# Altium PCB OPENMV_MT9V034.PcbDoc
Units mil, origin at the board's own origin, x right, y up, seen from the top; angles counter-clockwise.
Board outline 1377.95 x 695 mil, 2 copper layers (Top Layer, Bottom Layer); 15 components, 25 nets, 100 pads, 131 vias.
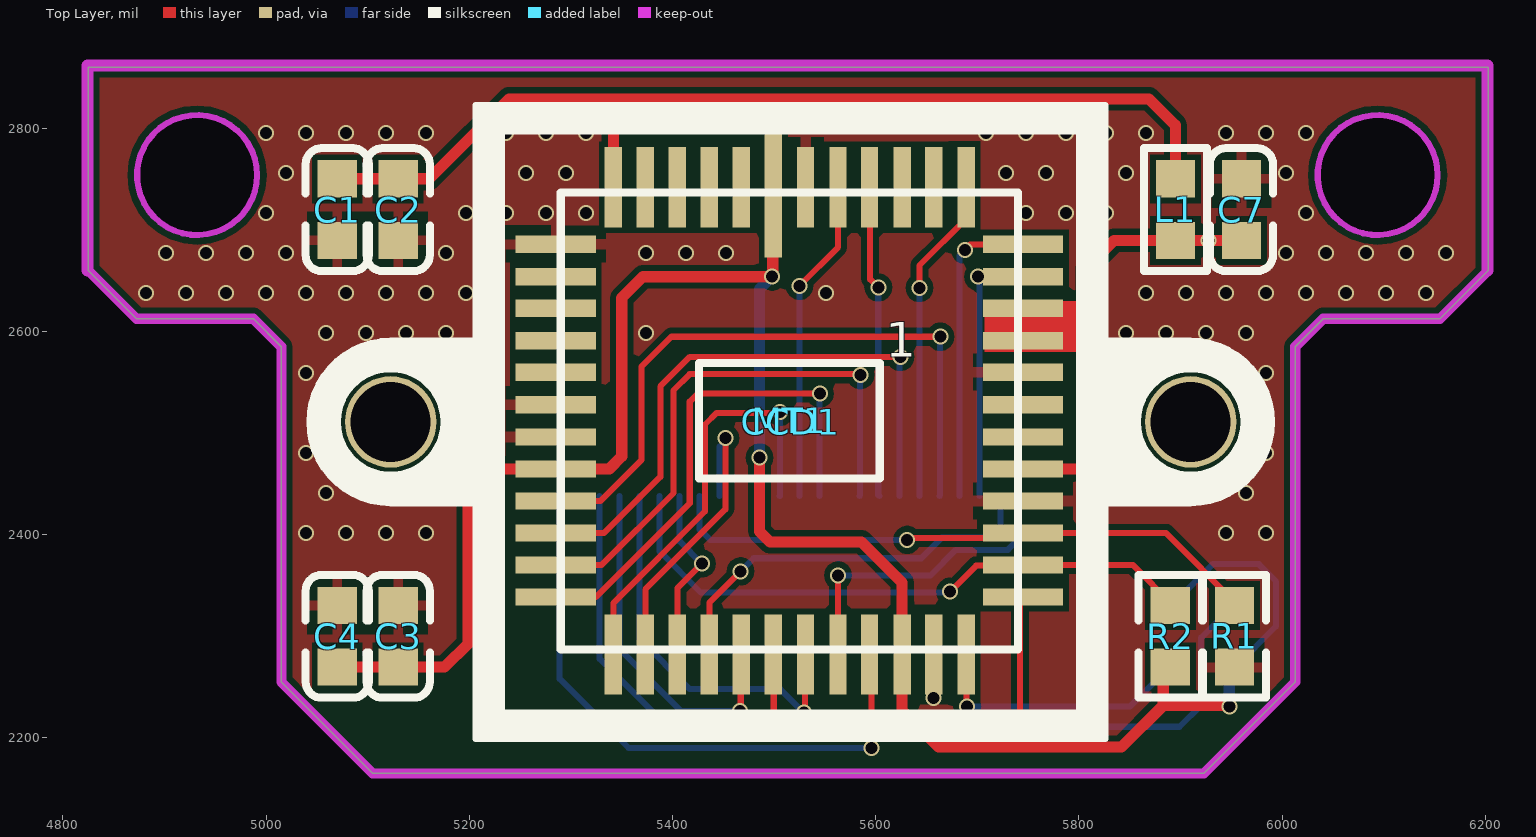
[diagram p0: Top Layer view]
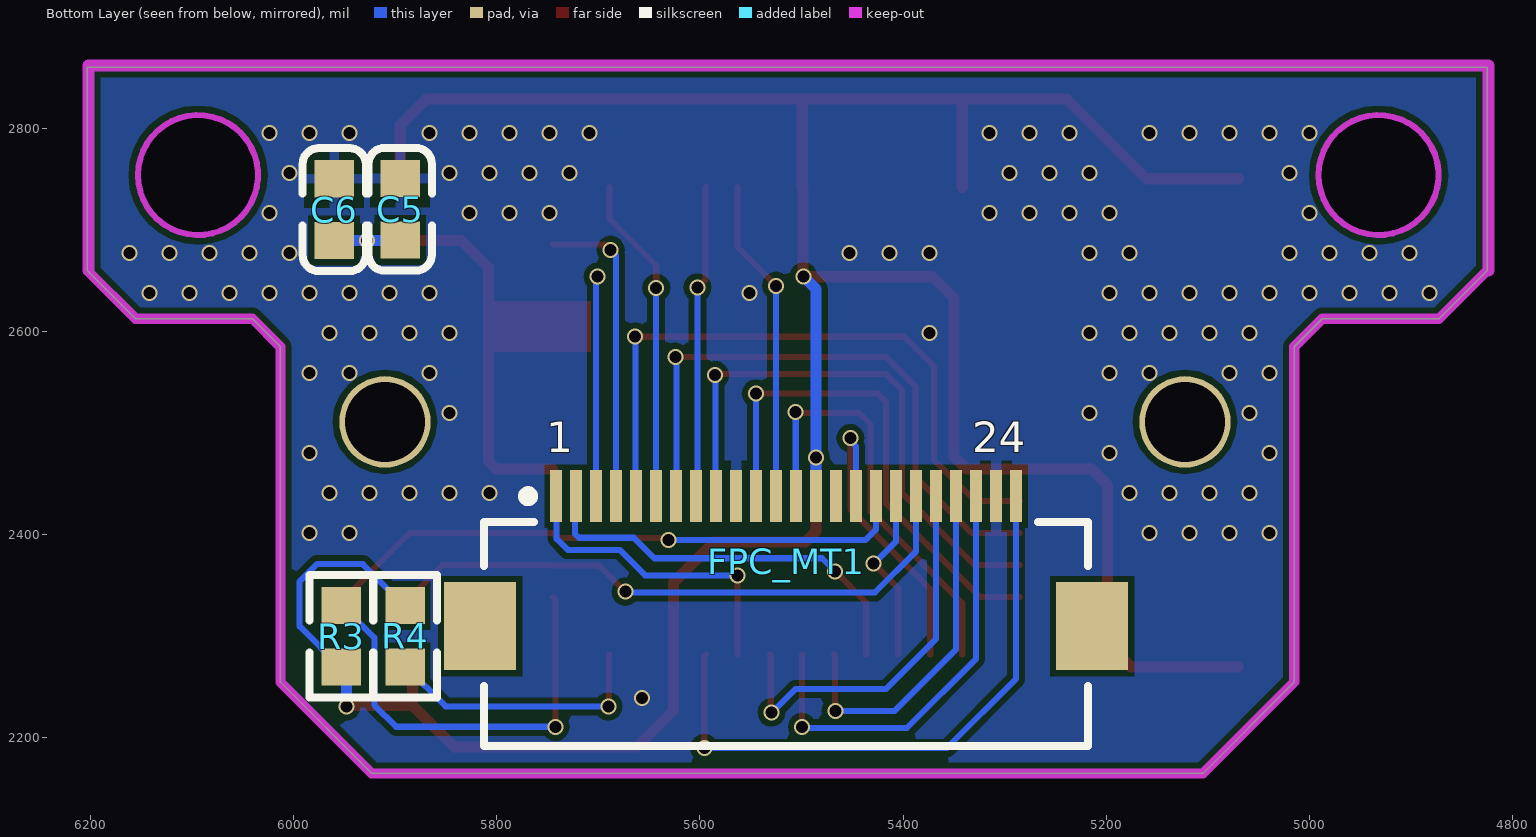
[diagram p1: Bottom Layer view, seen from below]
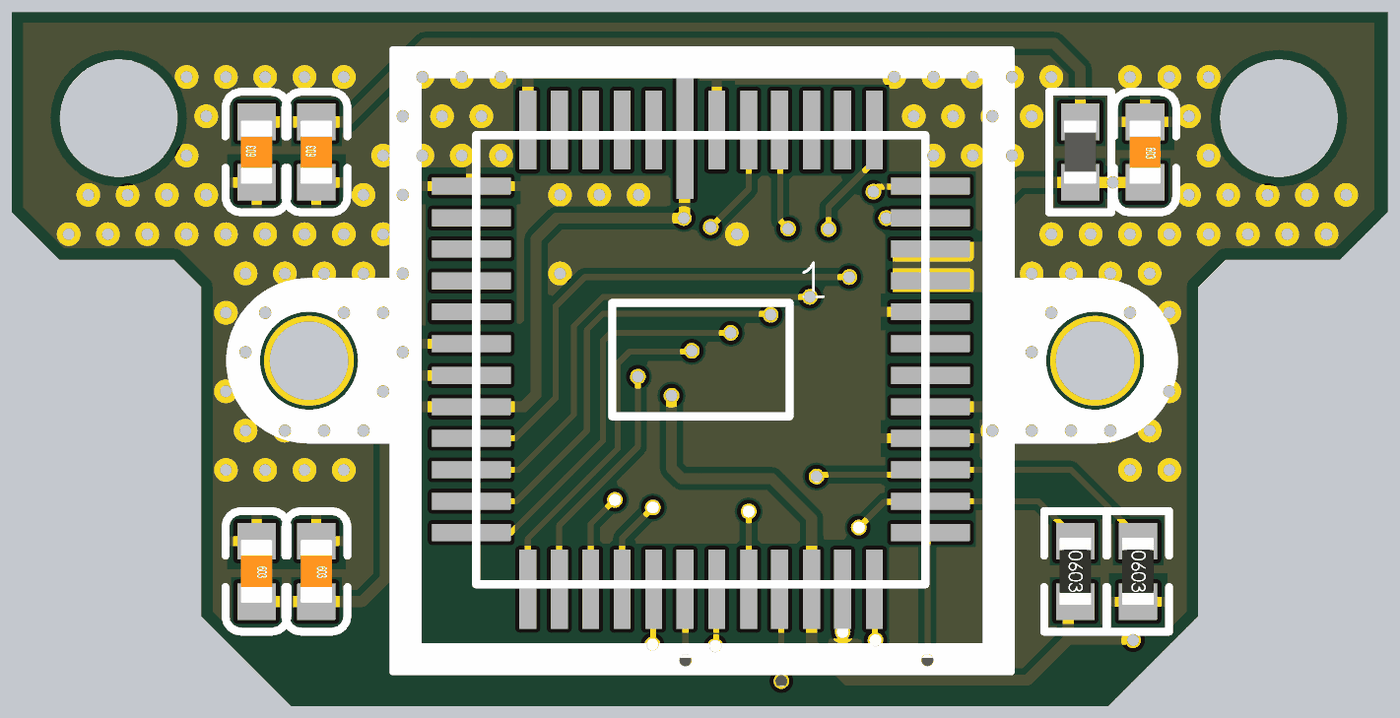
[diagram p2: 3D render of the assembled board from above, using the file's embedded part models]
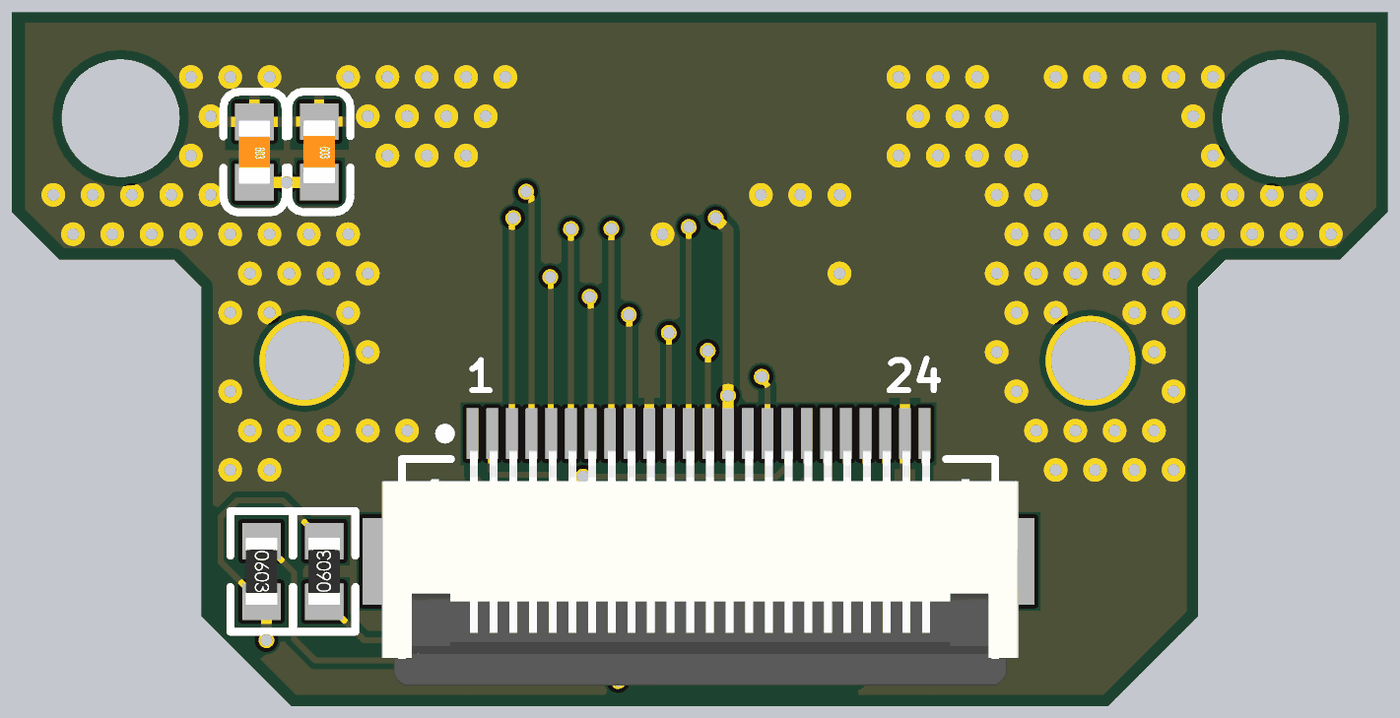
[diagram p3: 3D render of the assembled board from below, using the file's embedded part models]

## Layer stack, top to bottom
Top Solder: solder mask 0.4, Solder Resist, Dk 3.5
Top Layer: signal copper 1.4
Dielectric 1: dielectric 12.6, FR-4, Dk 4.8
Bottom Layer: signal copper 1.4
Bottom Solder: solder mask 0.4, Solder Resist, Dk 3.5

## Board outline
5015,2470 5015,2585 4987.5,2612.5 4872.5,2612.5 4825,2660 4825,2860 6202.95,2860 6202.95,2660 6155.45,2612.5 6040.45,2612.5 6012.95,2585 6012.95,2255 5922.95,2165 5105,2165 5015,2255
cut-out: 6034.94,2754 ccw(c6094,2754) 6094,2694.94 ccw(c6094,2754) 6153.06,2754 ccw(c6094,2754) 6094,2813.06 ccw(c6094,2754)
cut-out: 4872.99,2754 ccw(c4932.05,2754) 4932.05,2694.94 ccw(c4932.05,2754) 4991.1,2754 ccw(c4932.05,2754) 4932.05,2813.06 ccw(c4932.05,2754)

## Design rules (kind name [scope] priority, off if disabled: settings)
Clearance [All] p1: gap=6 ignorepadtopadclearanceinfootprint=FALSE except(0: Arc-Hole Track-Hole SMDPad-Hole THPad-Hole Via-Hole Fill-Hole Poly-Hole Region-Hole Text-Hole)
PolygonConnect [All] p1: connectstyle=Relief reliefconductorwidth=10 reliefentries=4 polygonreliefangle="90 Angle" airgapwidth=10
RoutingVias [All] p1: holewidth=11.81 width=15.75 viastyle="Through Hole" minholewidth=11.81 minwidth=15.75 maxholewidth=11.81 maxwidth=15.75
SolderMaskExpansion [All] p1: expansion=4 istentingtop=FALSE
Width [All] p1: maxlimit=20 minlimit=6 preferedwidth=6
30 further rules are at their usual default settings.

## Components (designator, comment, footprint, x,y, rotation, side; value= is the part's Value field where it differs from the comment)
C1 "104" LC-0603_C 5070,2720 r90 top value=0.1u
C2 "10uF" LC-0603_C 5130,2720 r90 top value=0.1u
C3 "104" LC-0603_C 5130,2300 r270 top value=0.1u
C4 "104" LC-0603_C 5070,2300 r270 top value=0.1u
C5 "104" LC-0603_C 5895,2720.32 r270 bottom value=0.1u
C6 "10uF" LC-0603_C 5960,2720 r270 bottom value=0.1u
C7 "104" LC-0603_C 5960,2720 r270 top value=0.1u
CCD1 "CCD" CCD_LENS_20MM 5516.3,2511 r0 top
FPC_MT1 "FPC_24" FPC_24 5515.6,2305.7 r180 bottom
L1 "180nH" LC-0603_L 5895,2720 r270 top value=FERRITE
MT1 "MT9V034" CLCC-48 5515,2512 r0 top
R1 "4.7K" LC-0603_R 5953,2300 r270 top value=1.5K
R2 "10K" LC-0603_R 5890,2300 r270 top
R3 "1K" LC-0603_R 5953,2300 r270 bottom
R4 "1K" LC-0603_R 5890,2300 r90 bottom

## Footprints (in the part's own frame and the unit in brackets; to place one, negate y for a bottom-side part, rotate by r counter-clockwise, add the part's x,y. Pads: shape width x height; smd on the part's side, far side on the other; paste and mask are expansions set on the pad)
CCD_LENS_20MM [mil]
  round 90 hole 78.74 mask+0: 0(-393.7,0) 0(393.7,0)
  silkscreen extent -474,-312 474,312
CLCC-48 [mil]
  rect 17x138 smd: 1(-15.75,230)
  rect 17x79 smd: 2(-47.24,230) 3(-78.74,230) 4(-110.24,230) 5(-141.73,230) 6(-173.23,230) 19(-173.23,-229.92) 20(-141.73,-229.92) 21(-110.24,-229.92) 22(-78.74,-229.92) 23(-47.24,-229.92) 24(-15.75,-229.92) 25(16,-229.92) 26(48,-229.92) 27(79,-229.92) 28(111,-229.92) 29(142,-229.92) 30(174,-229.92) 43(174,230) 44(142,230) 45(111,230) 46(79,230) 47(48,230) 48(16,230)
  rect 79x17 smd: 7(-229.92,174) 8(-229.92,142) 9(-229.92,111) 10(-229.92,79) 11(-229.92,48) 12(-229.92,16) 13(-229.92,-15.75) 14(-229.92,-47.24) 15(-229.92,-78.74) 16(-229.92,-110.24) 17(-229.92,-141.73) 18(-229.92,-173.23) 31(230,-173.23) 32(230,-141.73) 33(230,-110.24) 34(230,-78.74) 35(230,-47.24) 36(230,-15.75) 37(230,16) 38(230,48) 39(230,79) 40(230,111) 41(230,142) 42(230,174)
  silkscreen extent -225,-225 225,225
FPC_24 [mm]
  rect 0.3x1.3 smd: 1(-5.739,3.359) 2(-5.239,3.359) 3(-4.739,3.359) 4(-4.239,3.359) 5(-3.739,3.359) 6(-3.239,3.359) 7(-2.739,3.359) 8(-2.239,3.359) 9(-1.739,3.359) 10(-1.239,3.359) 11(-0.739,3.359) 12(-0.239,3.359) 13(0.261,3.359) 14(0.761,3.359) 15(1.261,3.359) 16(1.761,3.359) 17(2.261,3.359) 18(2.761,3.359) 19(3.261,3.359) 20(3.761,3.359) 21(4.261,3.359) 22(4.761,3.359) 23(5.261,3.359) 24(5.761,3.359)
  rect 1.8x2.2 smd: 25(-7.639,0.109) 26(7.661,0.109)
  silkscreen extent -7.54,-2.89 7.56,3.48, body extent -8.05,-3.05 8.15,2.95, height 2
LC-0603_C [mm]
  rect 0.93x0.98 smd: 1(-0.77,0) 2(0.77,0)
  silkscreen extent -1.53,-0.79 1.54,0.79, body extent -0.8,-0.4 0.8,0.4, height 0.3
LC-0603_L [mm]
  rect 0.93x0.98 smd: 1(-0.77,0) 2(0.77,0)
  silkscreen extent -1.53,-0.79 1.54,0.79, body extent -0.82,-0.41 0.83,0.41, height 0.46
LC-0603_R [mm]
  rect 0.93x0.98 smd: 1(-0.77,0) 2(0.77,0)
  silkscreen extent -1.53,-0.79 1.54,0.79, body extent -0.85,-0.4 0.85,0.4, height 0.56

## Part data
C1 C3 C4 C5 C6 C7: library part Cap_0603, "Capacitor"
C2: library part Cap_0402, "Capacitor"
CCD1: library part lensCCD_20
L1: library part Ind_0603, "Inductor"
MT1: "CMOS"
R1 R2 R3 R4: library part Res_0603, "Resistor"

## Via types
v1: diameter 15.75, hole 11.81, Top Layer to Bottom Layer, 131 vias

## Nets (pads, with @x,y where several pads share a name; then routed paths per layer and width w, separated by ;. In a path a pad name is that pad's centre, name@x,y a point inside that pad or via, vN(x,y) a via of type N, cw(c..) or ccw(c..) an arc to the next point about the centre after c; other vN are vias at no path point)
3V3: C1.2 C2.2 C3.2 C4.2 FPC_MT1.14 L1.1 MT1.1 MT1.6 MT1.14 MT1.28 R2.2 R3.2 R4.2 | length 3202.2
  Top Layer w11: C4.2 C3.2 5175.69,2269.68 5199,2293 5199,2449 5214.76,2464.76 MT1.14 5337.76,2464.76 5350,2477 5350,2633 5371,2654 v1(5498,2654) 5498.63,2654.63 5498.63,2741.37 MT1.1 5499.25,2826.25 5502,2829 ; C1.2 C2.2 5160.31,2750.31 5239,2829 5339,2829 ; MT1.6 5341.77,2826.23 5339,2829 ; v1(5485.65,2476) 5485.65,2403.35 5496,2393 5586,2393 5626,2353 MT1.28 5626,2227 5662,2191 5842,2191 5883,2232 ; R2.2 5883,2262.68 5883,2232 ; L1.1 5895,2803 5869,2829 5502,2829 ; v1(5948,2231) 5947,2232 5883,2232 ; 5339,2829 5502,2829
  Bottom Layer w6: R4.2 5890.98,2330.32 5931.67,2371 5977,2371 5994,2354 5994,2309.7 5953.98,2269.68 R3.2
  Bottom Layer w11: FPC_MT1.14 v1(5485.65,2476) 5485.65,2641.65 v1(5498,2654) ; v1(5948,2231) 5948,2264.68 R3.2
3V3A: C5.2 C6.2 C7.2 L1.2 MT1.35 MT1.39 MT1.40 | length 485.2
  Top Layer w11: MT1.35 5800.76,2464.76 5808,2472 5808,2628 5808.1,2628.1 5808.1,2663.1 5834.68,2689.68 L1.2 v1(5927.66,2689.68) C7.2
  Bottom Layer w11: C5.2 5895.31,2689.68 v1(5927.66,2689.68) C6.2
"DCMI CLK": FPC_MT1.12 MT1.47 | length 319.8
  Top Layer w6: v1(5525,2645) 5563,2683 MT1.47
  Bottom Layer w6: FPC_MT1.12 v1(5525,2645)
"DCMI D0": FPC_MT1.6 MT1.43 | length 323.2
  Top Layer w6: v1(5643,2643) 5643,2665 5689,2711 MT1.43
  Bottom Layer w6: v1(5643,2643) 5643.13,2642.87 FPC_MT1.6
"DCMI D1": FPC_MT1.4 MT1.42 | length 304.1
  Top Layer w6: v1(5687.9,2680.4) 5693,2685.5 5744.5,2685.5 MT1.42
  Bottom Layer w6: FPC_MT1.4 5682.5,2675 v1(5687.9,2680.4)
"DCMI D2": FPC_MT1.3 MT1.41 | length 216.6
  Bottom Layer w6: v1(5700.78,2653.93) 5702.19,2652.52 FPC_MT1.3
"DCMI D3": FPC_MT1.5 MT1.15 | length 656.8
  Top Layer w6: MT1.15 5329.26,2433.26 5369.66,2473.66 5369.66,2565.66 5398.86,2594.86 v1(5663.75,2594.86)
  Bottom Layer w6: FPC_MT1.5 5663.29,2438.42 5663.29,2594.39 v1(5663.75,2594.86)
"DCMI D4": FPC_MT1.7 MT1.16 | length 600.8
  Top Layer w6: MT1.16 5332.76,2401.76 5388,2457 5388,2545.97 5417.11,2575.08 v1(5624.27,2575.08)
  Bottom Layer w6: FPC_MT1.7 5623.22,2438.18 5623.22,2574.03 v1(5624.27,2575.08)
"DCMI D5": FPC_MT1.9 MT1.17 | length 556.7
  Top Layer w6: MT1.17 5330.27,2370.27 5401,2441 5401,2542 5417,2558 5584,2558 v1(5585,2557)
  Bottom Layer w6: FPC_MT1.9 5584.54,2438.41 5584.54,2556.54 v1(5585,2557)
"DCMI D6": FPC_MT1.11 MT1.18 | length 502.6
  Top Layer w6: MT1.18 5324.77,2338.77 5417,2431 5417,2531 5425,2539 v1(5545,2539)
  Bottom Layer w6: FPC_MT1.11 5544.71,2538.71 v1(5545,2539)
"DCMI D7": FPC_MT1.13 MT1.19 | length 426.3
  Top Layer w6: MT1.19 5341.77,2332.77 5432,2423 5432,2508.49 5443.51,2520 5505,2520 v1(5506,2521)
  Bottom Layer w6: FPC_MT1.13 5505.67,2438.28 5505.67,2520.67 v1(5506,2521)
"DCMI HSYNC": FPC_MT1.16 MT1.20 | length 304.9
  Top Layer w6: MT1.20 5373.27,2346.27 5452,2425 v1(5452,2495)
  Bottom Layer w6: FPC_MT1.16 5446.28,2486.65 5452,2492.36 v1(5452,2495)
"DCMI PCLK": FPC_MT1.8 MT1.46 | length 308.1
  Top Layer w6: MT1.46 5594.5,2741.5 5594.5,2651.39 v1(5602.54,2643.35)
  Bottom Layer w6: v1(5602.54,2643.35) 5602.54,2439.17 FPC_MT1.8
"DCMI PWDN": FPC_MT1.17 MT1.33 R1.1 | length 600.7
  Top Layer w6: v1(5631,2395) 5632.87,2396.87 5740.1,2396.87 MT1.33 5885.57,2401.76 5957.02,2330.31 R1.1@5958,2330.31
  Bottom Layer w6: FPC_MT1.17 5426.6,2405.4 5437,2395 v1(5631,2395)
"DCMI RST": FPC_MT1.19 MT1.32 R2.1 | length 605.6
  Top Layer w6: v1(5673.3,2343.92) 5699.01,2369.63 5744.37,2369.63 MT1.32 5853.06,2370.27 5893.02,2330.31 R2.1@5894,2330.31
  Bottom Layer w6: FPC_MT1.19 5387.23,2383.77 5427.87,2343.13 5672.5,2343.13 v1(5673.3,2343.92)
"DCMI VSYNC": FPC_MT1.18 MT1.21 | length 175
  Top Layer w6: MT1.21 5404.76,2347.38 v1(5428.98,2371.59)
  Bottom Layer w6: FPC_MT1.18 5406.96,2437.91 5406.96,2393.62 v1(5428.98,2371.59)
DGND: C1.1 C2.1 C3.1 C4.1 C5.1 C6.1 C7.1 FPC_MT1.10 FPC_MT1.23 MT1.7 MT1.12 MT1.13 MT1.29 MT1.34 MT1.38 MT1.48 R1.2
  other v1: 5657.1,2239.35 5039.37,2401.58 5078.74,2401.58 5118.11,2401.58 5157.48,2401.58 5944.89,2401.58 5984.26,2401.58 5059.06,2440.95 5098.43,2440.95 5137.8,2440.95 5177.17,2440.95 5807.09,2440.95 5846.46,2440.95 5885.83,2440.95 5925.2,2440.95 5964.57,2440.95 5039.37,2480.32 5196.85,2480.32 5984.26,2480.32 5059.06,2519.69 5216.54,2519.69 5846.46,2519.69 5039.37,2559.06 5078.74,2559.06 5157.48,2559.06 5196.85,2559.06 5866.14,2559.06 5944.89,2559.06 5984.26,2559.06 5059.06,2598.43 5098.43,2598.43 5137.8,2598.43 5177.17,2598.43 5216.54,2598.43 5374.02,2598.43 5846.46,2598.43 5885.83,2598.43 5925.2,2598.43 5964.57,2598.43 4881.89,2637.8 4921.26,2637.8 4960.63,2637.8 5000,2637.8 5039.37,2637.8 5078.74,2637.8 5118.11,2637.8 5157.48,2637.8 5196.85,2637.8 5551.18,2637.8 5866.14,2637.8 5905.52,2637.8 5944.89,2637.8 5984.26,2637.8 6023.63,2637.8 6063,2637.8 6102.37,2637.8 6141.74,2637.8 4901.58,2677.17 4940.95,2677.17 4980.32,2677.17 5019.69,2677.17 5177.17,2677.17 5216.54,2677.17 5374.02,2677.17 5413.39,2677.17 5452.76,2677.17 6003.94,2677.17 6043.31,2677.17 6082.68,2677.17 6122.05,2677.17 6161.42,2677.17 5000,2716.54 5196.85,2716.54 5236.22,2716.54 5275.59,2716.54 5314.96,2716.54 5748.03,2716.54 5787.4,2716.54 5826.77,2716.54 6023.63,2716.54 5019.69,2755.91 5216.54,2755.91 5255.91,2755.91 5295.28,2755.91 5728.35,2755.91 5767.72,2755.91 5807.09,2755.91 5846.46,2755.91 6003.94,2755.91 5000,2795.28 5039.37,2795.28 5078.74,2795.28 5118.11,2795.28 5157.48,2795.28 5236.22,2795.28 5275.59,2795.28 5314.96,2795.28 5708.66,2795.28 5748.03,2795.28 5787.4,2795.28 5826.77,2795.28 5866.14,2795.28 5944.89,2795.28 5984.26,2795.28 6023.63,2795.28
I2C1_SCL: FPC_MT1.20 MT1.25 | length 390
  Top Layer w6: v1(5529.64,2225.17) 5530.32,2225.85 5530.32,2281.4 MT1.25
  Bottom Layer w6: FPC_MT1.20 5367.54,2297.46 5417,2248 5506.03,2248 5528.86,2225.17 v1(5529.64,2225.17)
I2C1_SDA: FPC_MT1.22 MT1.24 | length 431.5
  Top Layer w6: MT1.24 5499.65,2281.68 v1(5499.65,2210.94)
  Bottom Layer w6: FPC_MT1.22 5328.17,2277.83 5396.18,2209.82 5498.53,2209.82 v1(5499.65,2210.94)
NetMT1_30: MT1.30 R4.1 | length 267.5
  Top Layer w6: MT1.30 5689.5,2281.58 5689.5,2231.5 v1(5690,2231)
  Bottom Layer w6: v1(5690,2231) 5850.33,2231 5889.02,2269.69 R4.1
NetMT1_31: MT1.31 R3.1 | length 428.3
  Top Layer w6: v1(5742,2211) 5742,2335.77 MT1.31
  Bottom Layer w6: v1(5742,2211) 5899,2211 5920.35,2232.35 5920.35,2298.65 5952.02,2330.31 R3.1
SPI3_MISO: FPC_MT1.21 MT1.23 | length 350.4
  Top Layer w6: v1(5466.6,2226.7) 5467.18,2227.28 5467.18,2281.5 MT1.23
  Bottom Layer w6: FPC_MT1.21 5347.86,2287.14 5408.3,2226.7 v1(5466.6,2226.7)
SPI3_MOSI: FPC_MT1.2 MT1.22 | length 403.4
  Top Layer w6: MT1.22 5436.26,2333.26 v1(5467,2364)
  Bottom Layer w6: v1(5467,2364) 5479.87,2376.87 5644.87,2376.87 5665,2397 5719,2397 5723,2401 5723,2436.83 FPC_MT1.2
SPI3_SCLK: FPC_MT1.1 MT1.26 | length 313
  Top Layer w6: MT1.26 v1(5563,2360)
  Bottom Layer w6: v1(5563,2360) 5654,2360 5679,2385 5730,2385 5741,2396 5741,2437.39 FPC_MT1.1
SPI3_SSEL: FPC_MT1.24 MT1.27 | length 607.6
  Top Layer w6: MT1.27 5595.74,2280.34 v1(5595.74,2190.09)
  Bottom Layer w6: FPC_MT1.24 5288.8,2258.2 5356.91,2190.09 v1(5595.74,2190.09)
pads on no net: CCD1.0 FPC_MT1.15 FPC_MT1.25 FPC_MT1.26 MT1.2 MT1.3 MT1.4 MT1.5 MT1.8 MT1.9 MT1.10 MT1.11 MT1.36 MT1.37 MT1.44 MT1.45

## Polygon pours and split planes (outlines as drawn)
no net on Bottom Layer "NONET_L02_P001" (solid, pour order 1): 4816,2887
DGND on Bottom Layer "DGND_L02_P000" (solid, remove dead copper, pour order 0): 4801,2887 4806,2892 6238,2892 6238,2230 6145,2137 6135,2147 4841,2147 4841,2570 4781,2630 4816,2665 4816,2887
DGND on Top Layer "DGND_L01_P002" (solid, remove dead copper, pour order 2): 4803,2894 6238,2894 6247,2885 6213,2851 6213,2139 4791,2139 4783,2147 4826,2190 4826,2898

## Keep-outs
Keep-Out Layer:
  circle w6: c4932.05,2754 r59.06
  circle w6: c6094,2754 r59.06
  lines w10: 4825,2660 4872.5,2612.5 4987.5,2612.5 5015,2585 5015,2470 5015,2255 5105,2165 5515,2165 ; 5512.95,2165 5922.95,2165 6012.95,2255 6012.95,2470 6012.95,2585 6040.45,2612.5 6155.45,2612.5 6202.95,2660
  lines w11.81: 4824.05,2660 4824.05,2862 6202,2862 6202,2660

## Other copper
Top Layer:
  rectangle net 3V3A: 5707,2580 5806,2630

## Text inside footprints (layer, text, board x,y; h text height)
FPC_MT1: Bottom Overlay "24" at 5332.11,2481.26 h30; Bottom Overlay "1" at 5751.4,2481.26 h30
MT1: Top Overlay "1" at 5610,2575 h34